# Altium PCB PCB.PcbDoc
Units mm, origin at the board's own origin, x right, y up, seen from the top; angles counter-clockwise.
Board outline 95 x 95 mm, 2 copper layers (Top Layer, Bottom Layer); 37 components, 174 nets, 449 pads, 190 vias.
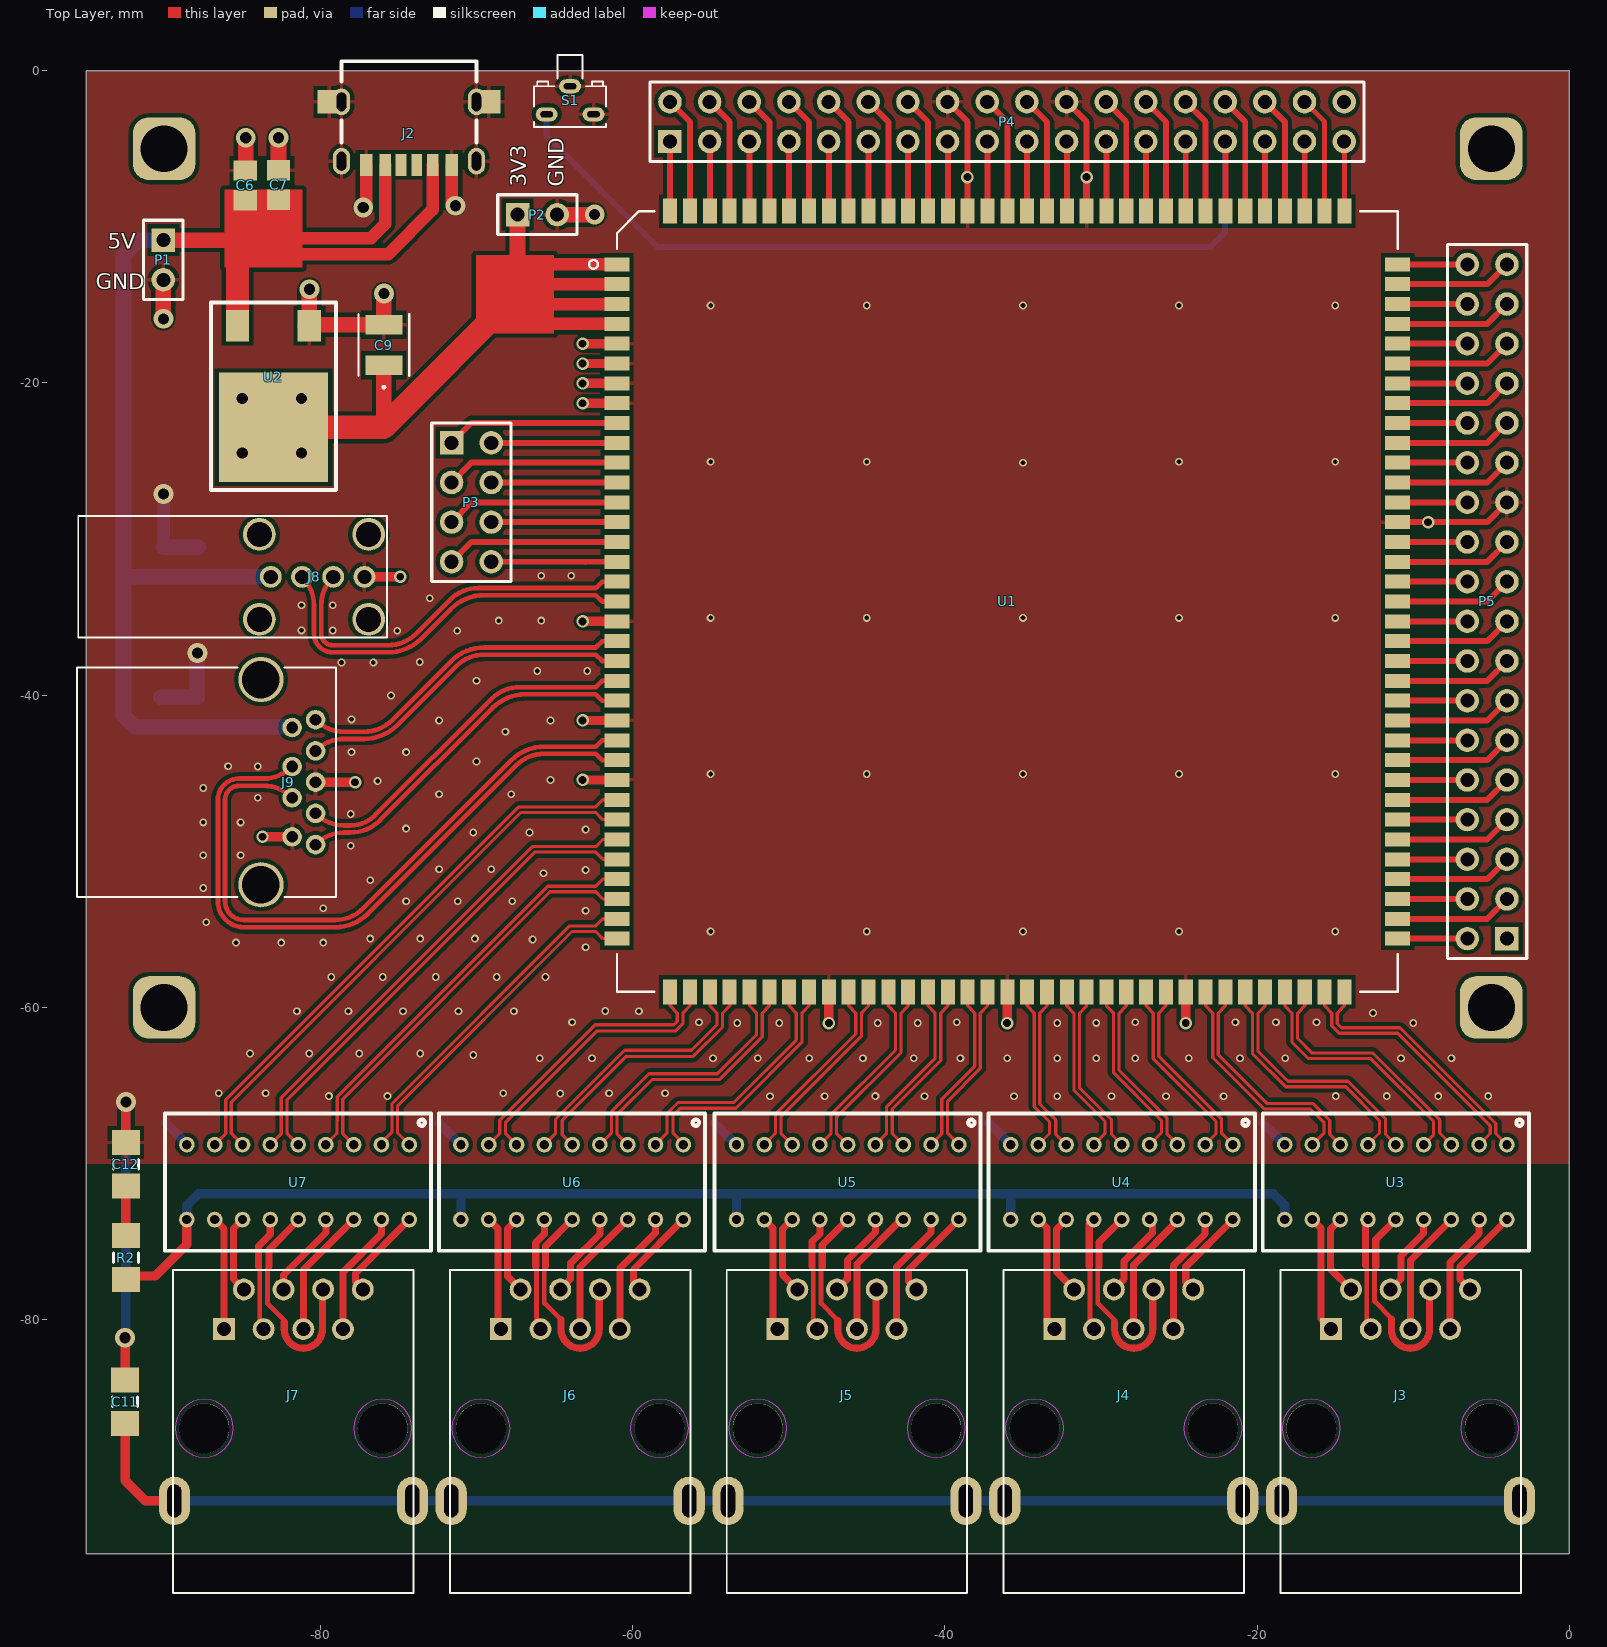
[diagram p0: Top Layer view]
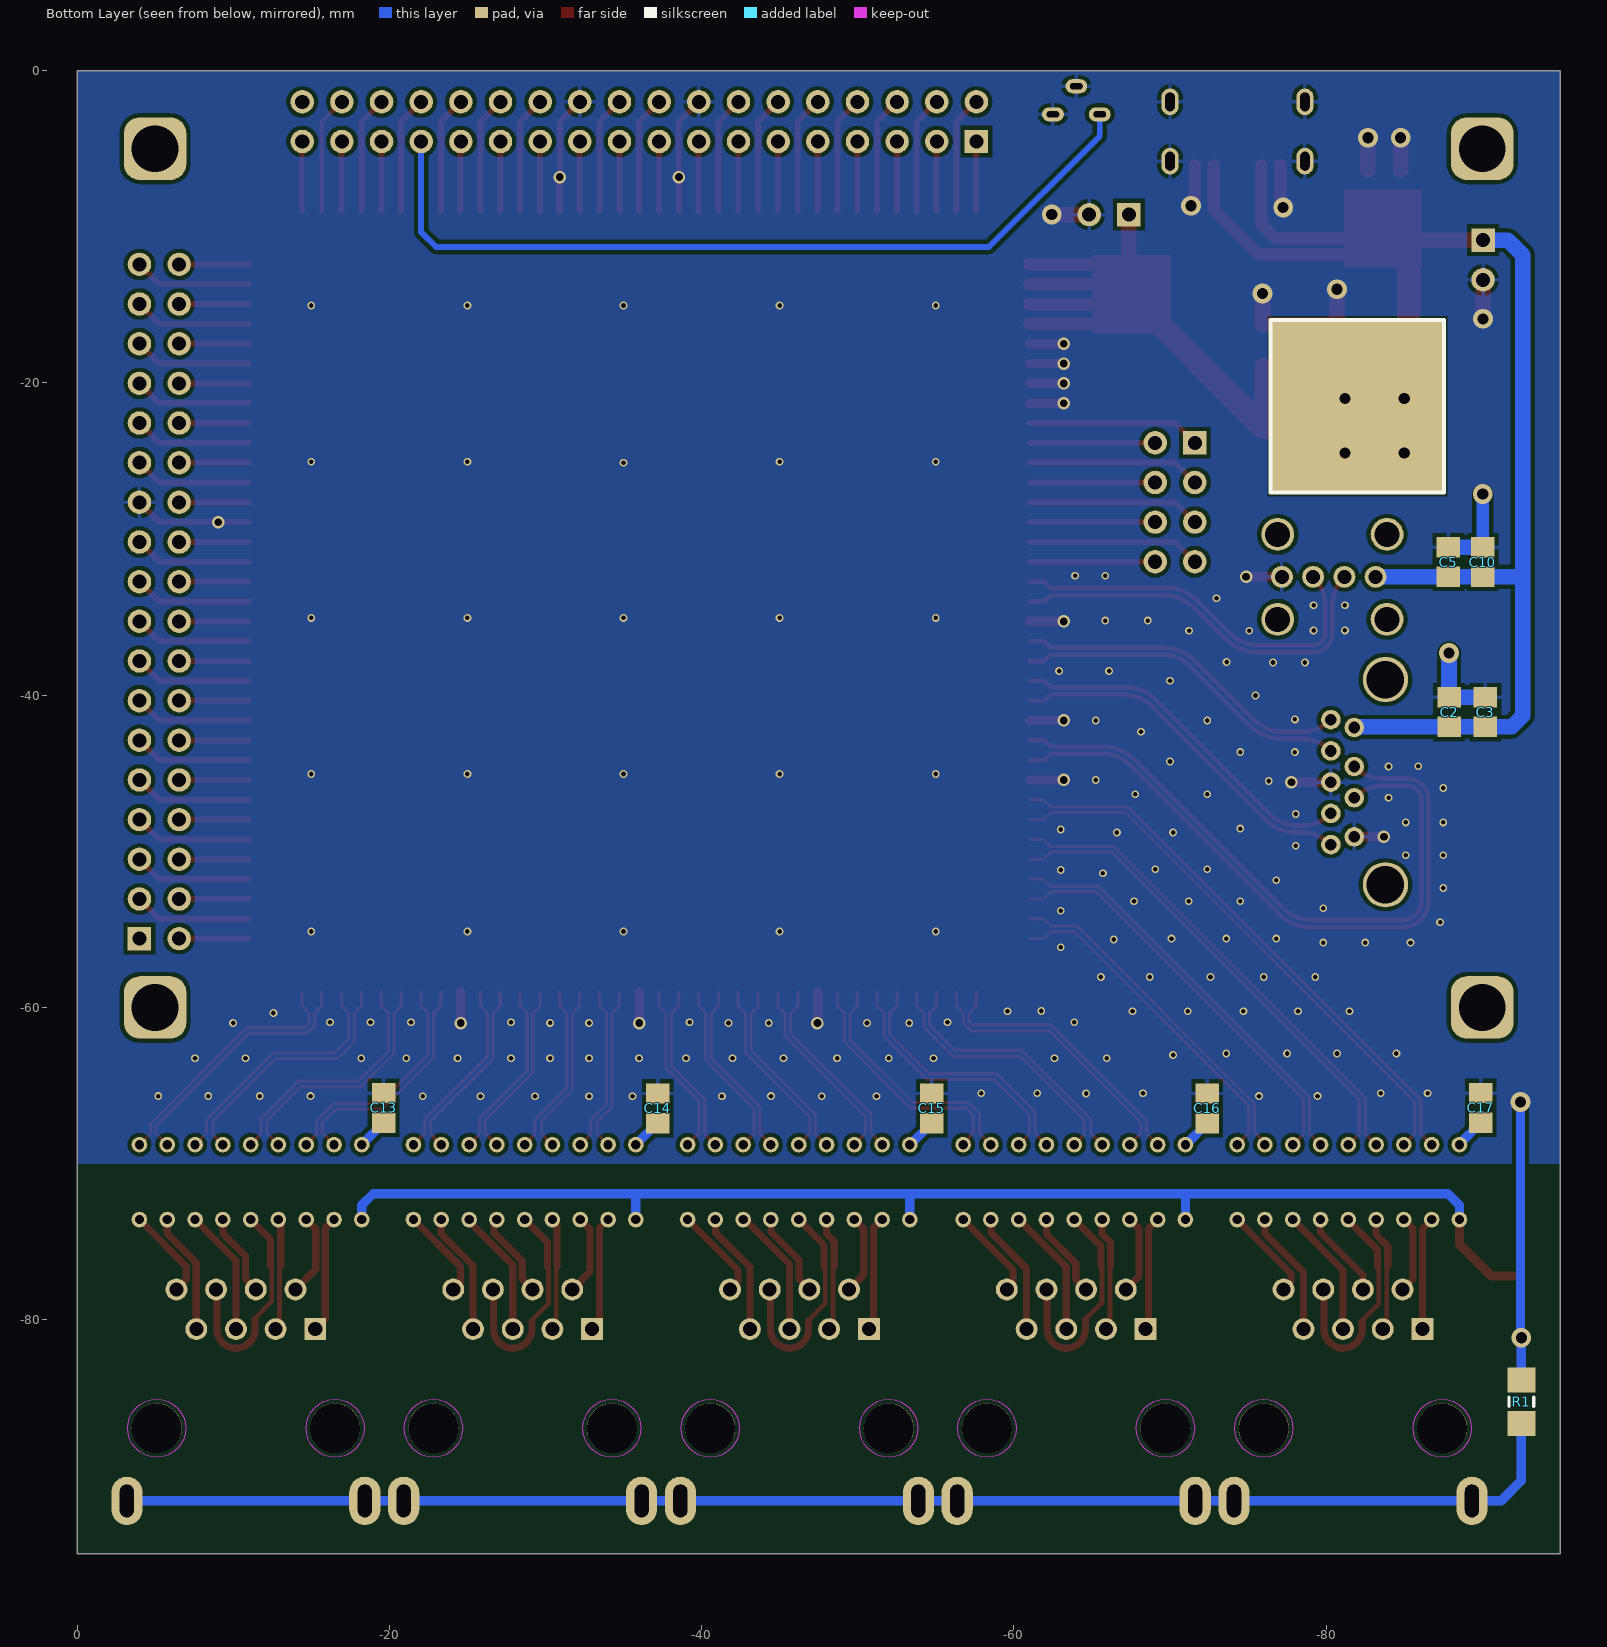
[diagram p1: Bottom Layer view, seen from below]

## Layer stack, top to bottom
Top Solder: solder mask 0.0102, Solder Resist, Dk 3.5
Top Layer: signal copper 0.0356
Dielectric 1: dielectric 0.32, FR-4, Dk 4.8
Bottom Layer: signal copper 0.0356
Bottom Solder: solder mask 0.0102, Solder Resist, Dk 3.5

## Board outline
-95,0 -95,-95 0,-95 0,0

## Design rules (kind name [scope] priority, off if disabled: settings)
Clearance Clearance_2 [InNamedPolygon('Top Layer-GND')] p1: gap=0.254 ignorepadtopadclearanceinfootprint=FALSE
Clearance Clearance_1 [InNamedPolygon('Bottom Layer-GND')] p2: gap=0.254 ignorepadtopadclearanceinfootprint=FALSE
Clearance [All] p3: gap=0.152 ignorepadtopadclearanceinfootprint=FALSE
DiffPairsRouting [All] p1: maxlimit=0.254 minlimit=0.102 mostfreqgap=0.152 toplayer_minwidth=0.203 toplayer_maxwidth=0.381 toplayer_prefwidth=0.305 bottomlayer_minwidth=0.203 bottomlayer_maxwidth=0.381 bottomlayer_prefwidth=0.305 maxuncoupledlength=12.7
HoleSize [All] p1: absolutevalues=TRUE maxlimit=5.08 minlimit=0.025 maxpercent=80.000 minpercent=20.000
MinimumSolderMaskSliver [All] p1: minsoldermaskwidth=0.102
PolygonConnect [All] p1: thpad.connectstyle=Relief thpad.reliefconductorwidth=0.254 thpad.reliefentries=4 thpad.polygonreliefangle="90 Angle" thpad.airgapwidth=0.254 smdpad.connectstyle=Relief smdpad.reliefconductorwidth=0.254 smdpad.reliefentries=4 smdpad.polygonreliefangle="90 Angle" smdpad.airgapwidth=0.254 via.connectstyle=Direct via.reliefconductorwidth=0.254 via.reliefentries=4 via.polygonreliefangle="90 Angle" via.airgapwidth=0.254
RoutingVias [All] p1: holewidth=0.711 width=1.27 viastyle="Through Hole" minholewidth=0.2 minwidth=0.4 maxholewidth=0.711 maxwidth=1.27
SilkToSolderMaskClearance [IsPad] p1: minsilkscreentomaskgap=0.102 clearancetoexposedcopper=TRUE
SolderMaskExpansion [All] p1: expansion=0.102
Width [All] p1: maxlimit=2 minlimit=0.254 preferedwidth=0.381
26 further rules are at their usual default settings.

## Classes and differential pairs
differential pair ESW_P4_D: +ESW_P4_D_P -ESW_P4_D_N
differential pair ESW_P4_C: +ESW_P4_C_P -ESW_P4_C_N
differential pair ESW_P4_B: +ESW_P4_B_P -ESW_P4_B_N
differential pair ESW_P4_A: +ESW_P4_A_P -ESW_P4_A_N
differential pair ESW_P3_D: +ESW_P3_D_P -ESW_P3_D_N
differential pair ESW_P3_C: +ESW_P3_C_P -ESW_P3_C_N
differential pair ESW_P3_B: +ESW_P3_B_P -ESW_P3_B_N
differential pair ESW_P3_A: +ESW_P3_A_P -ESW_P3_A_N
differential pair ESW_P2_D: +ESW_P2_D_P -ESW_P2_D_N
differential pair ESW_P2_C: +ESW_P2_C_P -ESW_P2_C_N
differential pair ESW_P2_B: +ESW_P2_B_P -ESW_P2_B_N
differential pair ESW_P2_A: +ESW_P2_A_P -ESW_P2_A_N
differential pair ESW_P1_D: +ESW_P1_D_P -ESW_P1_D_N
differential pair ESW_P1_C: +ESW_P1_C_P -ESW_P1_C_N
differential pair ESW_P1_B: +ESW_P1_B_P -ESW_P1_B_N
differential pair ESW_P1_A: +ESW_P1_A_P -ESW_P1_A_N
differential pair ESW_P0_D: +ESW_P0_D_P -ESW_P0_D_N
differential pair ESW_P0_C: +ESW_P0_C_P -ESW_P0_C_N
differential pair ESW_P0_B: +ESW_P0_B_P -ESW_P0_B_N
differential pair ESW_P0_A: +ESW_P0_A_P -ESW_P0_A_N
differential pair USB3: +USB3_P -USB3_N
differential pair USB3_SS_TX: +USB3_SS_TX_P -USB3_SS_TX_N
differential pair USB3_SS_RX: +USB3_SS_RX_P -USB3_SS_RX_N
differential pair USB2: +USB2_P -USB2_N
differential pair PCIE_TX2: +PCIE_TX2_P -PCIE_TX2_N
differential pair PCIE_TX1: +PCIE_TX1_P -PCIE_TX1_N
differential pair PCIE_TX0: +PCIE_TX0_P -PCIE_TX0_N
differential pair PCIE_RX2: +PCIE_RX2_P -PCIE_RX2_N
differential pair PCIE_RX1: +PCIE_RX1_P -PCIE_RX1_N
differential pair PCIE_RX0: +PCIE_RX0_P -PCIE_RX0_N
differential pair PCIE_CK2: +PCIE_CK2_P -PCIE_CK2_N
differential pair PCIE_CK1: +PCIE_CK1_P -PCIE_CK1_N
differential pair PCIE_CK0: +PCIE_CK0_P -PCIE_CK0_N

## Components (designator, comment, footprint, x,y, rotation, side; value= is the part's Value field where it differs from the comment)
C2 "Cap" 6-0805 -87.872,-41.081 r90 bottom value=0.1uF
C3 "Cap" 6-0805 -90.202,-41.081 r90 bottom value=106/10V
C5 "Cap" 6-0805 -87.83,-31.471 r90 bottom value=0.1uF
C6 "Cap" 6-0805 -84.8,-7.348 r270 top value=4.7uF
C7 "Cap" 6-0805 -82.675,-7.323 r270 top value=0.1uF
C9 "Cap Pol2" 3528B -75.925,-17.573 r90 top value=22uF
C10 "Cap" 6-0805 -90.03,-31.471 r90 bottom value=106/10V
C11 "Cap" 8-1206 -92.5,-85.248 r270 top value=1nF
C12 "Cap" 8-1206 -92.45,-70.048 r90 top value=1000pF/2KV
C13 "Cap" 6-0805 -19.64,-66.43 r90 bottom value=1nF/100V
C14 "Cap" 6-0805 -37.19,-66.459 r90 bottom value=1nF/100V
C15 "Cap" 6-0805 -54.742,-66.459 r90 bottom value=1nF/100V
C16 "Cap" 6-0805 -72.39,-66.459 r90 bottom value=1nF/100V
C17 "Cap" 6-0805 -89.9,-66.43 r90 bottom value=1nF/100V
J2 "USB Type-C 6P" "USB TYPE-C 6P" -74.32,-2 r180 top
J3 "RJ45*1" RJ45*1 -5.1,-86.95 r180 top
J4 "RJ45*1" RJ45*1 -22.826,-86.95 r180 top
J5 "RJ45*1" RJ45*1 -40.552,-86.95 r180 top
J6 "RJ45*1" RJ45*1 -58.279,-86.95 r180 top
J7 "RJ45*1" RJ45*1 -76.005,-86.95 r180 top
J8 "USB2.0" USB2.0 -83.17,-32.42 r270 top locked
J9 "USB3.0" USB3.0_0 -81.8,-42.07 r270 top locked
P1 "Header 2" HDR1X2 -90.05,-10.856 r270 top
P2 "Header 2" HDR1X2 -67.365,-9.223 r0 top
P3 "Header 4X2" HDR2X4 -71.59,-23.835 r270 top
P4 "Header 18X2" HDR2X18 -57.605,-4.54 r0 top
P5 "Header 18X2" HDR2X18 -4,-55.59 r90 top
R1 "Res2" 8-1206 -92.5,-85.248 r270 bottom value=1M
R2 "Res2" 8-1206 -92.45,-76.018 r270 top value=75
S1 "SW_PB" SW_PB -64,-1 r90 top
U1 "MT7621A" HLK-7621 -61,-12.41 r0 top locked
U2 "AMS1084CD-3.3" TO252 -83,-22.846 r180 top
U3 "transformer*1" TRANSFORMER_G1801D -4,-68.782 r180 top
U4 "transformer*1" TRANSFORMER_G1801D -21.55,-68.782 r180 top
U5 "transformer*1" TRANSFORMER_G1801D -39.102,-68.782 r180 top
U6 "transformer*1" TRANSFORMER_G1801D -56.75,-68.782 r180 top
U7 "transformer*1" TRANSFORMER_G1801D -74.3,-68.782 r180 top

## Footprints (in the part's own frame and the unit in brackets; to place one, negate y for a bottom-side part, rotate by r counter-clockwise, add the part's x,y. Pads: shape width x height; smd on the part's side, far side on the other; paste and mask are expansions set on the pad)
6-0805 [mm] "Chip Resistor; Body 2 x 1.2 mm (LxW typ)"
  rect 1.3x1.5 smd: 1(-0.95,0) 2(0.95,0)
8-1206 [mm] "Chip Resistor; Body 3.1 x 1.6 mm (LxW typ)"
  rect 1.6x1.8 smd: 1(-1.4,0) 2(1.4,0)
  silkscreen extent -0.3,-0.8 0.3,0.8
3528B [mm]
  rect 1.262x2.363 smd paste+0 mask+0: 1(-1.293,0) 2(1.293,0)
  silkscreen extent -2.78,-1.63 1.98,1.63, body extent 0,0 0.25,0.25, height 0.25
HDR1X2 [mm] "Connector; Header; 2 Position"
  rect 1.5x1.5 hole 0.9: 1(0,0)
  round 1.5 hole 0.9: 2(2.54,0)
  silkscreen extent -1.27,-1.27 3.81,1.27
HDR2X4 [mm] "Connector; Header; 4x2 Position"
  rect 1.5x1.5 hole 0.9: 1(0,0)
  round 1.5 hole 0.9: 2(0,2.54) 3(2.54,0) 4(2.54,2.54) 5(5.08,0) 6(5.08,2.54) 7(7.62,0) 8(7.62,2.54)
  silkscreen extent -1.27,-1.27 8.89,3.81
HDR2X18 [mm] "Connector; Header; 18x2 Position"
  rect 1.5x1.5 hole 0.9: 1(0,0)
  round 1.5 hole 0.9: 2(0,2.54) 3(2.54,0) 4(2.54,2.54) 5(5.08,0) 6(5.08,2.54) 7(7.62,0) 8(7.62,2.54) 9(10.16,0) 10(10.16,2.54) 11(12.7,0) 12(12.7,2.54) 13(15.24,0) 14(15.24,2.54) 15(17.78,0) 16(17.78,2.54) 17(20.32,0) 18(20.32,2.54) 19(22.86,0) 20(22.86,2.54) 21(25.4,0) 22(25.4,2.54) 23(27.94,0) 24(27.94,2.54) 25(30.48,0) 26(30.48,2.54) 27(33.02,0) 28(33.02,2.54) 29(35.56,0) 30(35.56,2.54) 31(38.1,0) 32(38.1,2.54) 33(40.64,0) 34(40.64,2.54) 35(43.18,0) 36(43.18,2.54)
  silkscreen extent -1.27,-1.27 44.45,3.81
HLK-7621 [mm]
  rect 1.6x0.9 smd: 1(0,0) 2(0,-1.27) 3(0,-2.54) 4(0,-3.81) 5(0,-5.08) 6(0,-6.35) 7(0,-7.62) 8(0,-8.89) 9(0,-10.16) 10(0,-11.43) 11(0,-12.7) 12(0,-13.97) 13(0,-15.24) 14(0,-16.51) 15(0,-17.78) 16(0,-19.05) 17(0,-20.32) 18(0,-21.59) 19(0,-22.86) 20(0,-24.13) 21(0,-25.4) 22(0,-26.67) 23(0,-27.94) 24(0,-29.21) 25(0,-30.48) 26(0,-31.75) 27(0,-33.02) 28(0,-34.29) 29(0,-35.56) 30(0,-36.83) 31(0,-38.1) 32(0,-39.37) 33(0,-40.64) 34(0,-41.91) 35(0,-43.18) 71(50,-43.18) 72(50,-41.91) 73(50,-40.64) 74(50,-39.37) 75(50,-38.1) 76(50,-36.83) 77(50,-35.56) 78(50,-34.29) 79(50,-33.02) 80(50,-31.75) 81(50,-30.48) 82(50,-29.21) 83(50,-27.94) 84(50,-26.67) 85(50,-25.4) 86(50,-24.13) 87(50,-22.86) 88(50,-21.59) 89(50,-20.32) 90(50,-19.05) 91(50,-17.78) 92(50,-16.51) 93(50,-15.24) 94(50,-13.97) 95(50,-12.7) 96(50,-11.43) 97(50,-10.16) 98(50,-8.89) 99(50,-7.62) 100(50,-6.35) 101(50,-5.08) 102(50,-3.81) 103(50,-2.54) 104(50,-1.27) 105(50,0)
  rect 0.9x1.6 smd: 36(3.41,-46.59) 37(4.68,-46.59) 38(5.95,-46.59) 39(7.22,-46.59) 40(8.49,-46.59) 41(9.76,-46.59) 42(11.03,-46.59) 43(12.3,-46.59) 44(13.57,-46.59) 45(14.84,-46.59) 46(16.11,-46.59) 47(17.38,-46.59) 48(18.65,-46.59) 49(19.92,-46.59) 50(21.19,-46.59) 51(22.46,-46.59) 52(23.73,-46.59) 53(25,-46.59) 54(26.27,-46.59) 55(27.54,-46.59) 56(28.81,-46.59) 56(28.81,-46.59) 57(30.08,-46.59) 58(31.35,-46.59) 59(32.62,-46.59) 60(33.89,-46.59) 61(35.16,-46.59) 62(36.43,-46.59) 63(37.7,-46.59) 64(38.97,-46.59) 65(40.24,-46.59) 66(41.51,-46.59) 67(42.78,-46.59) 68(44.05,-46.59) 69(45.32,-46.59) 70(46.59,-46.59) 106(46.59,3.41) 107(45.32,3.41) 108(44.05,3.41) 109(42.78,3.41) 110(41.51,3.41) 111(40.24,3.41) 112(38.97,3.41) 113(37.7,3.41) 114(36.43,3.41) 115(35.16,3.41) 116(33.89,3.41) 117(32.62,3.41) 118(31.35,3.41) 119(30.08,3.41) 120(28.81,3.41) 121(27.54,3.41) 122(26.27,3.41) 123(25,3.41) 124(23.73,3.41) 125(22.46,3.41) 126(21.19,3.41) 127(19.92,3.41) 128(18.65,3.41) 129(17.38,3.41) 130(16.11,3.41) 131(14.84,3.41) 132(13.57,3.41) 133(12.3,3.41) 134(11.03,3.41) 135(9.76,3.41) 136(8.49,3.41) 137(7.22,3.41) 138(5.95,3.41) 139(4.68,3.41) 140(3.41,3.41)
  silkscreen extent -1.78,-46.59 50,3.41
RJ45*1 [mm]
  rect 1.4x1.4 / inner round 1.4 / far side rect 1.4x1.4 hole 0.9: 1(10.16,-6.35)
  round 1.4 hole 0.9: 2(8.89,-8.89) 3(7.62,-6.35) 4(6.35,-8.89) 5(5.08,-6.35) 6(3.81,-8.89) 7(2.54,-6.35) 8(1.27,-8.89)
  oval 2x3.1 hole 0.9 slot 2.1 at 90 deg: 9(13.335,4.65) 10(-1.905,4.65)
  round 3.2 hole 3.2 unplated: ""(0,0) ""(11.43,0)
  Keep-Out Layer pour cut-out: 9.567,0 9.603,-0.363 9.709,-0.713 9.881,-1.035 10.113,-1.317 10.395,-1.549 10.717,-1.721 11.067,-1.827 11.43,-1.863 11.793,-1.827 12.143,-1.721 12.465,-1.549 12.747,-1.317 12.979,-1.035 13.151,-0.713 13.257,-0.363 13.293,0 13.257,0.363 13.151,0.713 12.979,1.035 12.747,1.317 12.465,1.549 12.143,1.721 11.793,1.827 11.43,1.863 11.067,1.827 10.717,1.721 10.395,1.549 10.113,1.317 9.881,1.035 9.709,0.713 9.603,0.363
  Keep-Out Layer pour cut-out: -1.863,0 -1.827,-0.363 -1.721,-0.713 -1.549,-1.035 -1.317,-1.317 -1.035,-1.549 -0.713,-1.721 -0.363,-1.827 0,-1.863 0.363,-1.827 0.713,-1.721 1.035,-1.549 1.317,-1.317 1.549,-1.035 1.721,-0.713 1.827,-0.363 1.863,0 1.827,0.363 1.721,0.713 1.549,1.035 1.317,1.317 1.035,1.549 0.713,1.721 0.363,1.827 0,1.863 -0.363,1.827 -0.713,1.721 -1.035,1.549 -1.317,1.317 -1.549,1.035 -1.721,0.713 -1.827,0.363
  silkscreen extent -1.99,-10.15 13.41,10.55
SW_PB [mm]
  oval 0.9x1.4 hole 0.4 slot 0.8 at 90 deg: 1(-1.8,1.5) 2(-1.8,-1.5) 3(0,0)
  silkscreen extent -2.6,-2.3 2,2.3
TO252 [mm]
  rect 1.5x2 smd paste+0 mask+0: 1(-2.3,-6.5) 3(2.3,-6.5)
  rect 7x7 smd paste+0 mask+0: 2(0,0)
  silkscreen extent -4,-8 4,4
TRANSFORMER_G1801D [mm]
  round 1 hole 0.6: 1(0,0) 2(1.78,0) 3(3.56,0) 4(5.34,0) 5(7.12,0) 6(8.9,0) 7(10.68,0) 8(12.46,0) 9(14.24,0) 10(14.24,4.8) 11(12.46,4.8) 12(10.68,4.8) 13(8.9,4.8) 14(7.12,4.8) 15(5.34,4.8) 16(3.56,4.8) 17(1.78,4.8) 18(0,4.8)
  silkscreen extent -1.4,-2 15.64,6.8
USB2.0 [mm]
  round 1.4 hole 0.9: 1(0,0) 2(0,2) 3(0,4) 4(0,6)
  round 2.1 hole 1.6: 5(2.72,-0.73) 6(-2.72,-0.73) 7(2.72,6.27) 8(-2.72,6.27)
  silkscreen extent -3.9,-12.33 3.9,7.44
USB3.0_0 [mm]
  round 1.25 hole 0.75: 1(0,0) 2(2.5,0) 3(4.5,0) 4(7,0) 5(7.5,1.5) 6(5.5,1.5) 7(3.5,1.5) 8(1.5,1.5) 9(-0.5,1.5)
  round 2.9 hole 2.4: ""(-3.07,-2) ""(10.07,-2)
  silkscreen extent -3.85,-13.78 10.85,2.82
"USB TYPE-C 6P" [mm]
  rect 0.7x1.4 smd paste+0 mask+0: A5(-0.5,4.05) B5(0.5,4.05)
  rect 0.76x1.4 smd paste+0 mask+0: A9(1.52,4.05) B9(-1.52,4.05)
  rect 0.8x1.4 smd paste+0 mask+0: A12(2.75,4.05) B12(-2.75,4.05)
  rect 1.5x1.5 smd paste+0 mask+0.102: ""(-5.1,0)
  oval 1.1x1.7 hole 1.2 slot 0.6 at 0 deg: ""(-4.32,3.8) ""(-4.32,0) ""(4.32,3.8) ""(4.32,0)
  rect 1.5x1.5 smd paste+0 mask+0: ""(5.1,0)
  silkscreen extent -4.32,-2.6 4.32,2.6

## Part data
C2 C3 C5 C6 C7 C10 C11 C12 C13 C14 C15 C16 C17: "Capacitor", LatestRevisionDate=17-Jul-2002, LatestRevisionNote="Re-released for DXP Platform.", PackageDescription="Radial Cap, Thru-Hole; 2 Leads; 0.3 in Pin Spacing", PackageReference=RAD-0.3, Published=8-Jun-2000, Publisher="Altium Limited"
C9: "Polarized Capacitor (Axial)", LatestRevisionDate=17-Jul-2002, LatestRevisionNote="Re-released for DXP Platform.", PackageDescription="Polarized Capacitor; 2 Leads", PackageReference=POLAR0.8, Published=8-Jun-2000, Publisher="Altium Limited"
P1 P2: "Header, 2-Pin", LatestRevisionDate=17-Jul-2002, LatestRevisionNote="Re-released for DXP Platform.", Publisher="Altium Limited"
P3: "Header, 4-Pin, Dual row", LatestRevisionDate=17-Jul-2002, LatestRevisionNote="Re-released for DXP Platform.", Publisher="Altium Limited"
P4 P5: "Header, 18-Pin, Dual row", LatestRevisionDate=17-Jul-2002, LatestRevisionNote="Re-released for DXP Platform.", Publisher="Altium Limited"
R1 R2: "Resistor", LatestRevisionDate=17-Jul-2002, LatestRevisionNote="Re-released for DXP Platform.", PackageDescription="Axial Device, Thru-Hole; 2 Leads; 0.4 in Pin Spacing", PackageReference=AXIAL-0.4, Published=8-Jun-2000, Publisher="Altium Limited"

## Free pads (board coordinates)
  rrect50% 4x4 hole 3: 1(-90,-5) 2(-5,-5) 3(-90,-60) 4(-5,-60)
  rect 11x11 smd far side: 2(-82,-21.5)

## Via types
v1: diameter 0.5, hole 0.3, Top Layer to Bottom Layer, tented both sides, 158 vias
v2: diameter 0.8, hole 0.5, Top Layer to Bottom Layer, tented both sides, 16 vias
v3: diameter 1.27, hole 0.711, Top Layer to Bottom Layer, tented both sides, 16 vias

## Nets (pads, with @x,y where several pads share a name; then routed paths per layer and width w, separated by ;. In a path a pad name is that pad's centre, name@x,y a point inside that pad or via, vN(x,y) a via of type N, cw(c..) or ccw(c..) an arc to the next point about the centre after c; other vN are vias at no path point)
3V3: C9.1 P2.1 pad.2@-82,-21.5 U1.1 U1.2 U1.3 U1.4 U2.2 | length 45.7
  Top Layer w0.8: -65.8,-12.41 U1.1 ; -65.55,-13.68 U1.2 ; -65.5,-14.95 U1.3 ; -65.4,-16.22 U1.4
  Top Layer w1: -75.925,-22.823 C9.1 ; -67.365,-13.533 P2.1
  Top Layer w1.5: U2.2 -75.948,-22.846 -75.925,-22.823 -67.4,-14.298
  other v3: -85,-24.5 -81.2,-24.5 -85,-21 -81.2,-21
5VD: C2.1 C3.1 C5.1 C6.2 C7.2 C10.1 J2.A9 J2.B9 J8.1 J9.1 P1.1 U2.3 | length 89.9
  Top Layer w0.8: -83.6,-10.448 -83.325,-10.723 -76.74,-10.723 -75.84,-9.823 J2.A9 ; -83.575,-11.748 -75.645,-11.748 -72.8,-8.903 J2.B9
  Top Layer w1: P1.1 -84.5,-10.856
  Top Layer w1.5: U2.3 -85.3,-11.798
  Bottom Layer w1: P1.1 -91.635,-10.856 -92.6,-11.821 -92.6,-32.4 ; C2.1 -81.839,-42.031 J9.1 ; C2.1 C3.1 -91.869,-42.031 -92.6,-41.3 -92.6,-32.4 ; J8.1@-83.171,-32.421 C5.1 C10.1 -92.579,-32.421 -92.6,-32.4
A_POR_BPS: P5.12 U1.81 | length 4.5
  Top Layer w0.381: U1.81 P5.12
CH340_RX: P5.25 U1.94 | length 7.5
  Top Layer w0.381: U1.94 -5.27,-26.38 P5.25
CH340_TX: P5.24 U1.93 | length 4.5
  Top Layer w0.381: U1.93 P5.24
CTS2_N: P3.7 U1.15 | length 11.1
  Top Layer w0.381: P3.7 -70.325,-30.19 U1.15
CTS3_N: P3.1 U1.9 | length 11.1
  Top Layer w0.381: P3.1 -70.325,-22.57 U1.9
ESW_P0_A_N: U1.29 U7.7 | length 35.6
  Top Layer w0.203: U7.7 -85.7,-68.062 -85.7,-66.062 -67.151,-47.513 -62.359,-47.513 -61.902,-47.97 U1.29
ESW_P0_A_P: U1.28 U7.8 | length 36.2
  Top Layer w0.203: U7.8 -86.056,-68.077 -86.056,-65.914 -67.298,-47.157 -62.359,-47.157 -61.902,-46.7 U1.28
ESW_P0_B_N: U1.31 U7.5 | length 31
  Top Layer w0.203: U7.5 -82.126,-68.076 -82.126,-65.911 -66.268,-50.053 -62.359,-50.053 -61.902,-50.51 U1.31
ESW_P0_B_P: U1.30 U7.6 | length 31.6
  Top Layer w0.203: U7.6 -82.5,-68.082 -82.5,-65.782 -66.415,-49.697 -62.359,-49.697 -61.902,-49.24 U1.30
ESW_P0_C_N: U1.33 U7.3 | length 26.5
  Top Layer w0.203: U7.3 -78.56,-68.082 -78.56,-65.867 -65.286,-52.593 -62.359,-52.593 -61.902,-53.05 U1.33
ESW_P0_C_P: U1.32 U7.4 | length 27.1
  Top Layer w0.203: U7.4 -78.933,-68.075 -78.933,-67.24 -78.915,-67.223 -78.915,-65.72 -65.433,-52.237 -62.359,-52.237 -61.902,-51.78 U1.32
ESW_P0_D_N: U1.35 U7.1 | length 21.6
  Top Layer w0.203: U7.1 -75.044,-68.037 -75.044,-66.301 -63.876,-55.133 -62.359,-55.133 -61.902,-55.59 U1.35
ESW_P0_D_P: U1.34 U7.2 | length 22.2
  Top Layer w0.203: U7.2 -76.08,-68.639 -75.4,-67.959 -75.4,-66.154 -64.023,-54.777 -62.359,-54.777 -61.902,-54.32 U1.34
ESW_P0_LED_0: P5.6 U1.75 | length 4.5
  Top Layer w0.381: U1.75 P5.6
ESW_P0_LED_1: P5.7 U1.76 | length 7.5
  Top Layer w0.381: U1.76 -5.27,-49.24 P5.7
ESW_P1_A_N: U1.37 U6.7 | length 17.9
  Top Layer w0.203: U6.7 -68.144,-68.067 -68.144,-67.371 -62.273,-61.5 -57.236,-61.5 -56.777,-61.041 -56.777,-60.359 -56.32,-59.902 U1.37
ESW_P1_A_P: U1.36 U6.8 | length 17.9
  Top Layer w0.203: U6.8 -68.5,-68.072 -68.5,-67.224 -62.386,-61.11 -57.348,-61.11 -57.133,-60.894 -57.133,-60.359 -57.59,-59.902 U1.36
ESW_P1_B_N: U1.39 U6.5 | length 17
  Top Layer w0.203: U6.5 -64.5,-68.152 -64.5,-67.235 -60.401,-63.136 -56.116,-63.136 -54.237,-61.257 -54.237,-60.359 -53.78,-59.902 U1.39
ESW_P1_B_P: U1.38 U6.6 | length 17.1
  Top Layer w0.203: U6.6 -64.945,-68.077 -64.945,-67.177 -60.548,-62.78 -60.525,-62.78 -60.484,-62.738 -56.221,-62.738 -54.593,-61.11 -54.593,-60.359 -55.05,-59.902 U1.38
ESW_P1_C_N: U1.41 U6.3 | length 16.6
  Top Layer w0.203: U6.3 -61,-68.092 -61,-66.882 -58.724,-64.606 -54.421,-64.606 -51.697,-61.882 -51.697,-60.359 -51.24,-59.902 U1.41
ESW_P1_C_P: U1.40 U6.4 | length 16.7
  Top Layer w0.203: U6.4 -61.356,-68.047 -61.356,-66.734 -61.3,-66.679 -61.3,-66.604 -58.946,-64.25 -54.568,-64.25 -52.053,-61.735 -52.053,-60.359 -52.51,-59.902 U1.40
ESW_P1_D_N: U1.43 U6.1 | length 15.8
  Top Layer w0.203: U6.1 -56.75,-68.702 -57.4,-68.052 -57.4,-66.904 -56.955,-66.459 -53.377,-66.459 -49.157,-62.239 -49.157,-60.359 -48.7,-59.902 U1.43
ESW_P1_D_P: U1.42 U6.2 | length 15.8
  Top Layer w0.203: U6.2 -57.8,-68.052 -57.8,-66.795 -57.09,-66.086 -53.507,-66.086 -49.513,-62.092 -49.513,-60.359 -49.97,-59.902 U1.42
ESW_P1_LED_0: P5.5 U1.74 | length 7.5
  Top Layer w0.381: U1.74 -5.27,-51.78 P5.5
ESW_P2_A_N: U1.46 U5.7 | length 12.4
  Top Layer w0.203: U5.7 -50.5,-68.064 -50.5,-66.996 -45.347,-61.843 -45.347,-60.359 -44.89,-59.902 U1.46
ESW_P2_A_P: U1.45 U5.8 | length 12.4
  Top Layer w0.203: U5.8 -50.856,-68.075 -50.856,-66.849 -45.703,-61.696 -45.703,-60.359 -46.16,-59.902 U1.45
ESW_P2_B_N: U1.48 U5.5 | length 12
  Top Layer w0.203: U5.5 -46.944,-68.06 -46.944,-67.029 -42.807,-62.892 -42.807,-60.359 -42.35,-59.902 U1.48
ESW_P2_B_P: U1.47 U5.6 | length 12
  Top Layer w0.203: U5.6 -47.3,-68.079 -47.3,-66.876 -43.163,-62.738 -43.163,-60.359 -43.62,-59.902 U1.47
ESW_P2_C_N: U1.50 U5.3 | length 11.6
  Top Layer w0.203: U5.3 -43.372,-68.072 -43.372,-66.5 -40.267,-63.395 -40.267,-60.359 -39.81,-59.902 U1.50
ESW_P2_C_P: U1.49 U5.4 | length 11.6
  Top Layer w0.203: U5.4 -43.728,-68.067 -43.728,-66.353 -40.623,-63.248 -40.623,-60.359 -41.08,-59.902 U1.49
ESW_P2_D_N: U1.52 U5.1 | length 11.1
  Top Layer w0.203: U5.1 -39.825,-68.059 -39.825,-66 -37.727,-63.902 -37.727,-60.359 -37.27,-59.902 U1.52
ESW_P2_D_P: U1.51 U5.2 | length 11.1
  Top Layer w0.203: U5.2 -40.2,-68.099 -40.2,-65.872 -38.083,-63.755 -38.083,-60.359 -38.54,-59.902 U1.51
ESW_P2_LED_0: P5.4 U1.73 | length 4.5
  Top Layer w0.381: U1.73 P5.4
ESW_P3_A_N: U1.55 U4.7 | length 10.7
  Top Layer w0.203: U1.55 -33.46,-59.902 -33.917,-60.359 -33.917,-66.186 -32.9,-67.203 -32.9,-68.112 U4.7
ESW_P3_A_P: U1.54 U4.8 | length 10.7
  Top Layer w0.203: U1.54 -34.73,-59.902 -34.273,-60.359 -34.273,-66.353 -33.3,-67.326 -33.3,-68.072 U4.8
ESW_P3_B_N: U1.57 U4.5 | length 11.1
  Top Layer w0.203: U1.57 -30.92,-59.902 -31.377,-60.359 -31.377,-65.141 -29.328,-67.19 -29.328,-68.124 U4.5
ESW_P3_B_P: U1.56 U4.6 | length 11.1
  Top Layer w0.203: U1.56@-32.19,-59 -32.19,-59.902 -31.733,-60.359 -31.733,-65.288 -29.75,-67.271 -29.75,-68.082 U4.6
ESW_P3_C_N: U1.59 U4.3 | length 11.5
  Top Layer w0.203: U1.59 -28.38,-59.902 -28.837,-60.359 -28.837,-64.035 -25.768,-67.104 -25.768,-68.124 U4.3
ESW_P3_C_P: U1.58 U4.4 | length 11.6
  Top Layer w0.203: U1.58 -29.65,-59.902 -29.193,-60.359 -29.193,-64.182 -26.124,-67.251 -26.124,-68.015 U4.4
ESW_P3_D_N: U1.61 U4.1 | length 12.1
  Top Layer w0.203: U1.61@-25.738,-59.102 U1.61 -25.84,-59.902 -26.297,-60.359 -26.297,-63.13 -22.277,-67.151 -22.277,-68.055 U4.1
ESW_P3_D_P: U1.60 U4.2 | length 12.1
  Top Layer w0.203: U1.60@-27.008,-59.102 U1.60 -27.11,-59.902 -26.653,-60.359 -26.653,-63.277 -22.632,-67.298 -22.632,-68.084 U4.2
ESW_P3_LED_0: P5.3 U1.72 | length 7.5
  Top Layer w0.381: U1.72 -5.27,-54.32 P5.3
ESW_P4_A_N: U1.64 U3.7 | length 14.9
  Top Layer w0.203: U1.64 -22.03,-59.902 -22.487,-60.359 -22.487,-63.04 -19.383,-66.144 -16.449,-66.144 -15.354,-67.239 -15.354,-68.108 U3.7
ESW_P4_A_P: U1.63 U3.8 | length 15
  Top Layer w0.203: U1.63 -23.3,-59.902 -22.843,-60.359 -22.843,-63.207 -19.55,-66.5 -16.596,-66.5 -15.709,-67.386 -15.709,-68.031 U3.8
ESW_P4_B_N: U1.66 U3.5 | length 15.9
  Top Layer w0.203: U1.66 -19.49,-59.902 -19.947,-60.359 -19.947,-62.8 -18.021,-64.726 -14.179,-64.726 -11.778,-67.128 -11.778,-68.124 U3.5
ESW_P4_B_P: U1.65 U3.6 | length 15.9
  Top Layer w0.203: U1.65 -20.76,-59.902 -20.303,-60.359 -20.303,-62.947 -18.168,-65.082 -14.327,-65.082 -12.161,-67.248 -12.161,-68.042 U3.6
ESW_P4_C_N: U1.68 U3.3 | length 16.3
  Top Layer w0.203: U1.68 -16.95,-59.902 -17.407,-60.359 -17.407,-61.989 -16.474,-62.922 -12.575,-62.922 -8.344,-67.153 -8.344,-67.156 -8.3,-67.2 -8.3,-68.042 U3.3
ESW_P4_C_P: U1.67 U3.4 | length 16.5
  Top Layer w0.203: U1.67@-18.118,-59.102 U1.67 -18.22,-59.902 -17.763,-60.359 -17.763,-62.227 -16.713,-63.277 -12.723,-63.277 -8.7,-67.3 -8.7,-68.142 U3.4
ESW_P4_D_N: U1.70 U3.1 | length 16.7
  Top Layer w0.203: U1.70 -14.41,-59.902 -14.867,-60.359 -14.867,-61.03 -14.597,-61.3 -10.846,-61.3 -4.712,-67.434 -4.712,-68.07 U3.1
ESW_P4_D_P: U1.69 U3.2 | length 16.7
  Top Layer w0.203: U1.69 -15.68,-59.902 -15.223,-60.359 -15.223,-61.177 -14.744,-61.656 -10.993,-61.656 -5.068,-67.581 -5.068,-68.07 U3.2
ESW_P4_LED_0: P5.2 U1.71 | length 4.5
  Top Layer w0.381: U1.71 P5.2
GE_MDC: P5.14 U1.83 | length 4.5
  Top Layer w0.381: U1.83 P5.14
GE_MDIO: P5.13 U1.82 | length 7.5
  Top Layer w0.381: U1.82 -5.27,-41.62 P5.13
GE_RXCLK: P5.22 U1.91 | length 4.5
  Top Layer w0.381: U1.91 P5.22
GE_RXD0: P5.20 U1.89 | length 4.5
  Top Layer w0.381: U1.89 P5.20
GE_RXD1: P5.19 U1.88 | length 7.5
  Top Layer w0.381: U1.88 -5.27,-34 P5.19
GE_RXD2: P5.18 U1.87 | length 4.5
  Top Layer w0.381: U1.87 P5.18
GE_RXD3: P5.17 U1.86 | length 7.5
  Top Layer w0.381: U1.86 -5.27,-36.54 P5.17
GE_RXDV: P5.21 U1.90 | length 7.5
  Top Layer w0.381: U1.90 -5.27,-31.46 P5.21
GE_TXCLK: P5.16 U1.85 | length 4.5
  Top Layer w0.381: U1.85 P5.16
GE_TXD0: P5.11 U1.80 | length 7.5
  Top Layer w0.381: U1.80 -5.27,-44.16 P5.11
GE_TXD1: P5.10 U1.79 | length 4.5
  Top Layer w0.381: U1.79 P5.10
GE_TXD2: P5.9 U1.78 | length 7.5
  Top Layer w0.381: U1.78 -5.27,-46.7 P5.9
GE_TXD3: P5.8 U1.77 | length 4.5
  Top Layer w0.381: U1.77 P5.8
GE_TXEN: P5.15 U1.84 | length 7.5
  Top Layer w0.381: U1.84 -5.27,-39.08 P5.15
GND: C2.2 C3.2 C5.2 C6.1 C7.1 C9.2 C10.2 C11.1 C12.2 C13.2 C14.2 C15.2 C16.2 C17.2 J2. J2.A12 J2.B12 J8.4 J9.4 J9.7 P1.2 P2.2 P4.16 P4.22 P5.23 R1.1 S1.2 S1.3 U1.5 U1.6 U1.7 U1.8 U1.19 U1.24 U1.27 U1.44 U1.53 U1.62 U1.92 U1.119 U1.125 U2.1 | length 108.3
  Top Layer w0.381: P4.16 -38.54,-3.285 v2@-38.54,-6.823 ; v2(-38.55,-6.823) -38.55,-8.99 U1.125 ; P4.22 -30.92,-3.285 v2@-30.92,-6.748 ; U1.92 v2(-9.05,-28.92) -5.27,-28.92 P5.23
  Top Layer w0.457: U1.27@-61.007,-45.423 U1.27 ; U1.19@-61.003,-35.273 U1.19 ; v2@-47.43,-60.99 v2(-47.42,-61) ; U1.119 v2(-30.92,-6.823) v2@-30.92,-6.748
  Top Layer w0.6: C11.1 v3(-92.5,-81.155) ; C12.2 v3(-92.45,-66.048) ; v2(-83.7,-49.07) J9.4@-81.827,-49.07 ; J9.7 v2(-77.775,-45.57) ; J8.4 v2(-74.875,-32.42) ; v2(-63.2,-45.423) -63.193,-45.43 U1.27 ; v2(-63.2,-41.62) U1.24 ; v2(-63.2,-35.273) -63.197,-35.27 U1.19 ; v2(-63.2,-21.3) U1.8 ; v2(-63.2,-20.03) U1.7 ; v2(-63.2,-18.76) U1.6 ; v2(-63.2,-17.49) U1.5 ; v2@-47.43,-60.99 U1.44 ; v2(-36.011,-61) -36,-60.989 U1.53 ; v2(-24.572,-61) -24.57,-60.998 U1.62
  Top Layer w0.8: v3(-77.25,-8.76) -77.07,-8.58 J2.A12 ; J2.B12 -71.57,-8.43 v3(-71.347,-8.653)
  Top Layer w1: v3(-90.05,-15.896) P1.2 ; C6.1@-84.775,-6.373 v3(-84.775,-4.298) ; C7.1 v3(-82.675,-4.298) ; U2.1 v3(-80.7,-14) ; U2.1@-80.634,-16.28 C9.2 ; C9.2 v3(-75.924,-14.273) ; P2.2 v3(-62.425,-9.223)
  Top Layer w1.5: U2.1 U2.1@-80.634,-16.28
  Bottom Layer w0.6: R1.1 v3(-92.5,-81.155) -92.45,-81.105 v3(-92.45,-66.048)
  Bottom Layer w0.8: C10.2 v3(-90.03,-27.121)
  Bottom Layer w1: C3.2 C2.2 v3(-87.872,-37.3) ; C10.2 C5.2
  other v1: -51.2,-65.689 -47.7,-65.689 -41.3,-65.689 -35.574,-65.689 -32.8,-65.689 -29.328,-65.689 -25.84,-65.689 -22.145,-65.689 -79.45,-65.68 -75.7,-65.68 -44.45,-65.68 -14.96,-65.68 -11.7,-65.68 -8.4,-65.68 -5.2,-65.68 -86.5,-65.5 -83.5,-65.5 -68.276,-65.5 -64.629,-65.509 -61.5,-65.5 -57.915,-65.5 -54.85,-63.25 -51.982,-63.25 -45.25,-63.25 -41.986,-63.25 -39.003,-63.25 -36,-63.25 -21.091,-63.25 -18.204,-63.25 -65.948,-63.248 -62.6,-63.248 -48.681,-63.248 -32.8,-63.248 -30.3,-63.248 -27.8,-63.248 -24.375,-63.248 -10.79,-63.248 -7.56,-63.248 -70.2,-63.048 -84.5,-62.948 -80.7,-62.948 -77.5,-62.948 -73.6,-62.948 -53.3,-60.99 -50.6,-61 -44.3,-60.99 -41.729,-60.99 -32.8,-61 -30.3,-60.989 -10,-61 -63.87,-60.948 -55.75,-60.953 -39.235,-60.948 -27.8,-60.953 -21.393,-60.948 -18.8,-60.948 -16.2,-60.953 -12.575,-60.359 -81.5,-60.248 -78.2,-60.248 -74.7,-60.248 -71.142,-60.248 -67.6,-60.248 -59.596,-60.248 -61.75,-60.223 -79.3,-58.048 -76,-58.048 -72.6,-58.048 -68.7,-58.048 -65.575,-58.048 -63.005,-56.148 -85.4,-55.848 -82.5,-55.848 -79.815,-55.848 -66.4,-55.648 -76.8,-55.59 -73.6,-55.59 -70.1,-55.59 -55,-55.133 -45,-55.133 -35,-55.133 -25,-55.133 -15,-55.133 -87.3,-54.548 -63.005,-53.8 -79.815,-53.648 -74.5,-53.2 -71.2,-53.2 -67.7,-53.2 -87.5,-52.348 -76.8,-51.848 -65.7,-51.4 -63.005,-51.2 -72.39,-51.148 -69.05,-51.148 -87.5,-50.248 -85.1,-50.248 -78.048,-49.648 -70.2,-48.799 -66.6,-48.8 -63.005,-48.6 -74.5,-48.548 -87.5,-48.148 -85.1,-48.148 -78.048,-47.614 -84,-46.57 -72.39,-46.348 -67.774,-46.348 -87.5,-45.948 -76.325,-45.498 -65.25,-45.43 -55,-45.048 -45,-45.048 -35,-45.048 -25,-45.048 -15,-45.048 -84,-44.57 -85.9,-44.548 -70,-44.248 -78,-43.648 -74.5,-43.648 -68.144,-42.341 -72.39,-41.62 -65.25,-41.62 -78,-41.548 -75.475,-40.023 -70,-39.08 -66.1,-38.448 -62.9,-38.448 -78.64,-37.91 -76.6,-37.91 -73.625,-37.873 -75.074,-35.873 -71.225,-35.873 -81.2,-35.848 -79.2,-35.859 -68.575,-35.223 -65.85,-35.223 -55,-35.048 -45,-35.048 -35,-35.048 -25,-35.048 -15,-35.048 -81.2,-34.244 -79.2,-34.244 -72.984,-33.798 -65.85,-32.348 -63.925,-32.348 -35,-25.11 -55,-25.048 -45,-25.048 -25,-25.048 -15,-25.048 -55,-15.048 -45,-15.048 -35,-15.048 -25,-15.048 -15,-15.048
GPIO0: P5.35 U1.104 | length 7.5
  Top Layer w0.381: U1.104 -5.27,-13.68 P5.35
I2C_CLK: P5.27 U1.96 | length 7.5
  Top Layer w0.381: U1.96 -5.27,-23.84 P5.27
I2C_SDA: P5.28 U1.97 | length 4.5
  Top Layer w0.381: U1.97 P5.28
JTAG_CLK: P4.17 U1.124 | length 4.5
  Top Layer w0.381: U1.124@-37.285,-8.985 U1.124 -37.27,-4.555 P4.17
JTAG_DI: P4.19 U1.122 | length 4.5
  Top Layer w0.381: P4.19 -34.73,-4.555 U1.122
JTAG_DO: P4.20 U1.121 | length 7.5
  Top Layer w0.381: P4.20 -33.46,-3.285 U1.121
JTAG_MS: P4.21 U1.120 | length 4.5
  Top Layer w0.381: P4.21 -32.19,-4.555 U1.120
JTAG_RST: P4.18 U1.123 | length 7.5
  Top Layer w0.381: P4.18 -36,-3.285 U1.123
ND_ALE: P4.3 U1.138 | length 4.5
  Top Layer w0.381: P4.3 -55.05,-4.555 U1.138
ND_CLE: P4.4 U1.137 | length 7.5
  Top Layer w0.381: P4.4 -53.78,-3.285 U1.137
ND_CS_N: P4.5 U1.136 | length 4.5
  Top Layer w0.381: P4.5 -52.51,-4.555 U1.136
ND_D0: P4.8 U1.133 | length 7.5
  Top Layer w0.381: P4.8 -48.7,-3.285 U1.133
ND_D1: P4.9 U1.132 | length 4.5
  Top Layer w0.381: P4.9 -47.43,-4.555 U1.132
ND_D2: P4.10 U1.131 | length 7.5
  Top Layer w0.381: P4.10 -46.16,-3.285 U1.131
ND_D3: P4.11 U1.130 | length 4.5
  Top Layer w0.381: P4.11 -44.89,-4.555 U1.130
ND_D4: P4.12 U1.129 | length 7.5
  Top Layer w0.381: P4.12 -43.62,-3.285 U1.129
ND_D5: P4.13 U1.128 | length 4.5
  Top Layer w0.381: P4.13 -42.35,-4.555 U1.128
ND_D6: P4.14 U1.127 | length 7.5
  Top Layer w0.381: P4.14 -41.08,-3.285 U1.127
ND_D7: P4.15 U1.126 | length 4.5
  Top Layer w0.381: U1.126@-39.825,-8.985 U1.126 -39.81,-4.555 P4.15
ND_RB_N: P4.7 U1.134 | length 4.5
  Top Layer w0.381: P4.7 -49.97,-4.555 U1.134
ND_RE_N: P4.6 U1.135 | length 7.5
  Top Layer w0.381: P4.6 -51.24,-3.285 U1.135
ND_WE_N: P4.2 U1.139 | length 7.5
  Top Layer w0.381: P4.2 -56.32,-3.285 U1.139
ND_WP: P4.1 U1.140 | length 4.5
  Top Layer w0.381: P4.1 -57.59,-4.555 U1.140
NetC11_2: C11.2 J3.9 J3.10 J4.9 J4.10 J5.9 J5.10 J6.9 J6.10 J7.9 J7.10 R1.2 | length 100.8
  Top Layer w0.6: C11.2 -92.5,-90.3 -91.2,-91.6 J7.9
  Bottom Layer w0.6: R1.2 -92.5,-90.3 -91.2,-91.6 J7.9 J7.10 J6.9 J6.10 J5.9 J5.10 J4.9 J4.10 J3.9 J3.10
NetC12_1: C12.1 R2.1 | length 3.2
  Top Layer w0.6: R2.1 C12.1
NetC13_1: C13.1 U3.9 | length 2
  Bottom Layer w0.6: C13.1 -19.64,-67.382 U3.9
NetC14_1: C14.1 U4.9 | length 2
  Bottom Layer w0.6: C14.1 -37.163,-67.409 U4.9
NetC15_1: C15.1 U5.9 | length 2
  Bottom Layer w0.6: C15.1 -53.37,-68.782 U5.9
NetC16_1: C16.1 U6.9 | length 2
  Bottom Layer w0.6: C16.1 -71.017,-68.782 U6.9
NetC17_1: C17.1 U7.9 | length 2
  Bottom Layer w0.6: C17.1 -88.54,-68.74 U7.9
NetJ3_1: J3.1 U3.11 | length 7.5
  Top Layer w0.457: U3.11 -15.9,-74.142 -15.9,-79.96 J3.1
NetJ3_2: J3.2 U3.12 | length 5.3
  Top Layer w0.457: U3.12 -15.29,-74.192 -15.29,-76.76 J3.2
NetJ3_3: J3.3 U3.13 | length 7.2
  Top Layer w0.305: -13.051,-76.52 cw(c-13.235,-76.704) -12.975,-76.704 -12.975,-80.345 J3.3
  Top Layer w0.457: -13.051,-76.52 -13.051,-73.733 U3.13
NetJ3_4: J3.4 U3.15 | length 5.4
  Top Layer w0.457: J3.4 -10.79,-77.4 -10.79,-75.919 -9.34,-74.47 U3.15
NetJ3_5: J3.5 U3.16 | length 8.1
  Top Layer w0.457: J3.5 -10.18,-76.202 U3.16
NetJ3_6: J3.6 U3.14 | length 14.4
  Top Layer w0.305: -12.4,-76.58 ccw(c-12.219,-76.761) -12.475,-76.761 -12.475,-78.83 -11.405,-79.9 -11.405,-79.955
  Top Layer w0.457: -12.4,-76.58 -12.4,-74.862 U3.14 ; -11.405,-79.955 -11.405,-80.621 ccw(c-10.18,-80.6) -8.955,-80.6 -8.955,-78.105 J3.6
NetJ3_7: J3.7 U3.17 | length 7.8
  Top Layer w0.457: J3.7 -7.64,-76.337 -5.78,-74.477 U3.17
NetJ3_8: J3.8 U3.18 | length 6
  Top Layer w0.457: J3.8 -7,-77.43 -7,-76.582 U3.18
NetJ4_1: J4.1 U4.11 | length 7.4
  Top Layer w0.457: U4.11 -33.46,-74.132 -33.46,-80.126 J4.1
NetJ4_2: J4.2 U4.12 | length 5.2
  Top Layer w0.457: U4.12 -32.85,-74.202 -32.85,-76.926 J4.2
NetJ4_3: J4.3 U4.13 | length 7.2
  Top Layer w0.305: -30.775,-76.58 cw(c-30.956,-76.761) -30.7,-76.761 -30.7,-80.346 J4.3@-30.521,-80.525
  Top Layer w0.457: -30.775,-76.58 -30.749,-76.554 -30.749,-73.881 U4.13
NetJ4_4: J4.4 U4.15 | length 5.6
  Top Layer w0.457: J4.4 -28.516,-77.4 -28.516,-76.24 -26.7,-74.424 -26.7,-73.772 U4.15
NetJ4_5: J4.5 U4.16 | length 8.2
  Top Layer w0.457: J4.5 -27.906,-76.493 -25.11,-73.696 U4.16
NetJ4_6: J4.6 U4.14 | length 14.5
  Top Layer w0.305: -30.125,-76.58 ccw(c-29.944,-76.761) -30.2,-76.761 -30.2,-78.955 -29.131,-80.024 -29.131,-80.105
  Top Layer w0.457: -30.125,-76.58 -30.125,-75.037 U4.14 ; -29.131,-80.105 -29.131,-80.621 ccw(c-27.906,-80.6) -26.681,-80.6 -26.681,-78.105 J4.6
NetJ4_7: J4.7 U4.17 | length 7.9
  Top Layer w0.457: J4.7 -25.366,-76.535 -23.33,-74.498 U4.17
NetJ4_8: J4.8 U4.18 | length 5.9
  Top Layer w0.457: J4.8 -24.572,-77.584 -24.572,-76.604 U4.18
NetJ5_1: J5.1 U5.11 | length 7.4
  Top Layer w0.457: U5.11 -51,-74.144 -51,-80.313 J5.1
NetJ5_2: J5.2 U5.12 | length 5.1
  Top Layer w0.457: U5.12 -50.39,-74.19 -50.39,-77.112 J5.2
NetJ5_3: J5.3 U5.13 | length 7.2
  Top Layer w0.305: -48.5,-76.58 cw(c-48.681,-76.761) -48.425,-76.761 -48.425,-80.348 J5.3@-48.246,-80.526
  Top Layer w0.457: -48.5,-76.58 -48.5,-74.997 -48.002,-74.5 U5.13
NetJ5_4: J5.4 U5.15 | length 5.5
  Top Layer w0.457: J5.4 -46.242,-77.4 -46.242,-76.172 -44.442,-74.372 U5.15
NetJ5_5: J5.5 U5.16 | length 8.3
  Top Layer w0.457: J5.5 -45.632,-76.424 -42.79,-73.582 U5.16
NetJ5_6: J5.6 U5.14 | length 14.6
  Top Layer w0.305: -47.85,-76.605 ccw(c-47.669,-76.786) -47.925,-76.786 -47.925,-78.955 -46.857,-80.022 -46.857,-80.055
  Top Layer w0.457: -47.85,-76.605 -47.85,-75.209 U5.14 ; -46.857,-80.055 -46.857,-80.621 ccw(c-45.632,-80.6) -44.407,-80.6 -44.407,-78.105 J5.6
NetJ5_7: J5.7 U5.17 | length 7.9
  Top Layer w0.457: J5.7 -43.092,-76.621 -40.882,-74.411 U5.17
NetJ5_8: J5.8 U5.18 | length 6
  Top Layer w0.457: J5.8 -42.327,-77.556 -42.327,-76.806 U5.18
NetJ6_1: J6.1 U6.11 | length 7.3
  Top Layer w0.457: U6.11 -68.625,-74.167 -68.625,-80.414 J6.1
NetJ6_2: J6.2 U6.12 | length 5.1
  Top Layer w0.457: U6.12 -68.015,-74.167 -68.015,-77.213 J6.2
NetJ6_3: J6.3 U6.13 | length 7.3
  Top Layer w0.305: -66.2,-76.58 cw(c-66.321,-76.7) -66.15,-76.7 -66.15,-80.349 J6.3@-65.948,-80.551
  Top Layer w0.457: -66.2,-76.58 -66.2,-75.05 -65.65,-74.5 U6.13
NetJ6_4: J6.4 U6.15 | length 5.5
  Top Layer w0.457: J6.4 -63.968,-77.4 -63.968,-76.378 -62.09,-74.5 U6.15
NetJ6_5: J6.5 U6.16 | length 8.3
  Top Layer w0.457: J6.5 -63.359,-76.631 U6.16
NetJ6_6: J6.6 U6.14 | length 14.6
  Top Layer w0.305: -65.575,-76.577 ccw(c-65.394,-76.758) -65.65,-76.758 -65.65,-78.955 -65.609,-78.955 -64.584,-79.98
  Top Layer w0.457: -65.575,-76.577 -65.575,-75.287 U6.14 ; -64.584,-79.98 -64.584,-80.621 ccw(c-63.359,-80.6) -62.134,-80.6 -62.134,-78.105 J6.6
NetJ6_7: J6.7 U6.17 | length 8
  Top Layer w0.457: J6.7 -60.8,-80.581 -60.8,-76.697 -58.53,-74.427 U6.17
NetJ6_8: J6.8 U6.18 | length 6
  Top Layer w0.457: J6.8 -59.946,-77.663 -59.946,-76.778 U6.18
NetJ7_1: J7.1 U7.11 | length 7.3
  Top Layer w0.457: U7.11 -86.165,-74.177 J7.1
NetJ7_2: J7.2 U7.12 | length 5
  Top Layer w0.457: U7.12 -85.555,-74.157 -85.555,-77.4 J7.2
NetJ7_3: J7.3 U7.13 | length 7.5
  Top Layer w0.305: -83.95,-76.58 cw(c-84.131,-76.761) -83.875,-76.761 -83.875,-80.35 J7.3
  Top Layer w0.457: -83.95,-76.58 -83.95,-75.295 -83.2,-74.545 U7.13
NetJ7_4: J7.4 U7.15 | length 5.6
  Top Layer w0.457: J7.4 -82.355,-77.137 -79.64,-74.422 U7.15
NetJ7_5: J7.5 U7.16 | length 8.4
  Top Layer w0.457: J7.5 -81.085,-76.807 U7.16
NetJ7_6: J7.6 U7.14 | length 14.7
  Top Layer w0.305: -83.29,-76.58 ccw(c-83.086,-76.784) -83.375,-76.784 -83.375,-78.98 -82.31,-80.045 -82.31,-80.149
  Top Layer w0.457: -83.29,-76.58 -83.29,-75.52 -81.42,-73.65 U7.14 ; -82.31,-80.149 -82.31,-80.621 ccw(c-81.085,-80.6) -79.86,-80.6 -79.86,-78.105 J7.6
NetJ7_7: J7.7 U7.17 | length 8
  Top Layer w0.457: J7.7 -78.545,-76.955 -76.08,-74.49 U7.17
NetJ7_8: J7.8 U7.18 | length 6.1
  Top Layer w0.457: J7.8 -77.75,-77.585 -77.75,-77.032 U7.18
NetR2_2: R2.2 U3.10 U4.10 U5.10 U6.10 U7.10 | length 83.8
  Top Layer w0.6: R2.2@-92.45,-77.2 -90.573,-77.2 -88.54,-75.167 U7.10@-88.54,-73.97
  Bottom Layer w0.6: U7.10 -88.54,-72.67 -87.8,-71.93 -70.8,-71.93 ; U6.10 -70.99,-72.12 -70.8,-71.93 ; U5.10 -53.342,-72.072 -53.2,-71.93 ; U4.10 -35.79,-72.02 -35.7,-71.93 ; U3.10 -18.24,-72.659 -18.969,-71.93 -35.7,-71.93 ; -70.8,-71.93 -53.2,-71.93 ; -53.2,-71.93 -35.7,-71.93
PCIE_CK0_N: P4.23 U1.118 | length 4.5
  Top Layer w0.381: P4.23 -29.65,-4.555 U1.118
PCIE_CK0_P: P4.24 U1.117 | length 7.5
  Top Layer w0.381: P4.24 -28.38,-3.285 U1.117
PCIE_CK1_N: P4.31 U1.110 | length 4.5
  Top Layer w0.381: P4.31 -19.49,-4.555 U1.110
PCIE_CK1_P: P4.30 U1.111 | length 7.5
  Top Layer w0.381: P4.30 -20.76,-3.285 U1.111
PCIE_CK2_N: P5.33 U1.102 | length 7.5
  Top Layer w0.381: U1.102 -5.27,-16.22 P5.33
PCIE_CK2_P: P5.34 U1.103 | length 4.5
  Top Layer w0.381: U1.103 P5.34
PCIE_RX0_N: P4.27 U1.114 | length 4.5
  Top Layer w0.381: P4.27 -24.57,-4.555 U1.114
PCIE_RX0_P: P4.28 U1.113 | length 7.5
  Top Layer w0.381: P4.28 -23.3,-3.285 U1.113
PCIE_RX1_N: P4.32 U1.109 | length 7.5
  Top Layer w0.381: P4.32 -18.22,-3.285 U1.109
PCIE_RX1_P: P4.33 U1.108 | length 4.5
  Top Layer w0.381: P4.33 -16.95,-4.555 U1.108
PCIE_RX2_N: P5.32 U1.101 | length 4.5
  Top Layer w0.381: U1.101 P5.32
PCIE_RX2_P: P5.31 U1.100 | length 7.5
  Top Layer w0.381: U1.100 -5.27,-18.76 P5.31
PCIE_TX0_N: P4.26 U1.115 | length 7.5
  Top Layer w0.381: P4.26 -25.84,-3.285 U1.115
PCIE_TX0_P: P4.25 U1.116 | length 4.5
  Top Layer w0.381: P4.25 -27.11,-4.555 U1.116
PCIE_TX1_N: P4.34 U1.107 | length 7.5
  Top Layer w0.305: P4.34 -15.68,-3.285 U1.107
PCIE_TX1_P: P4.35 U1.106 | length 4.5
  Top Layer w0.305: P4.35 -14.41,-4.555 U1.106
  Top Layer w0.381: U1.106@-14.425,-8.985 U1.106
PCIE_TX2_N: P5.29 U1.98 | length 7.5
  Top Layer w0.381: U1.98 -5.27,-21.3 P5.29
PCIE_TX2_P: P5.30 U1.99 | length 4.5
  Top Layer w0.381: U1.99 P5.30
PERST_N: P5.36 U1.105 | length 4.5
  Top Layer w0.381: U1.105 P5.36
RESET: P5.26 U1.95 | length 4.5
  Top Layer w0.381: U1.95 P5.26
RTS2_N: P3.6 U1.14 | length 8.1
  Top Layer w0.381: P3.6 U1.14@-61.005,-28.915 ; -63.005,-28.915 -63,-28.92
RTS3_N: P3.8 U1.16 | length 8.1
  Top Layer w0.381: P3.8 U1.16@-61.005,-31.455 ; -63.005,-31.455 -63,-31.46
RXD2: P3.3 U1.11 | length 11.1
  Top Layer w0.381: P3.3 -70.325,-25.11 U1.11
RXD3: P3.5 U1.13 | length 11.1
  Top Layer w0.381: P3.5 -70.325,-27.65 U1.13
TXD2: P3.2 U1.10 | length 8.1
  Top Layer w0.381: P3.2 U1.10@-61.005,-23.835 ; -63.005,-23.835 -63,-23.84
TXD3: P3.4 U1.12 | length 8.1
  Top Layer w0.381: P3.4 U1.12@-61.005,-26.375 ; -63.005,-26.375 -63,-26.38
USB2_N: J8.2 U1.18 | length 25.4
  Top Layer w0.305: J8.2 -81.143,-32.447 cw(c-82.939,-34.244) -80.399,-34.244 -80.399,-36.059 ccw(c-79.2,-36.059) -79.2,-37.257 -75.652,-37.257 ccw(c-75.652,-34.26) -73.533,-36.379 -71.625,-34.471 cw(c-69.506,-36.591) -69.506,-33.594 -62.359,-33.594 -61.952,-34 U1.18
USB2_P: J8.3 U1.17 | length 24.7
  Top Layer w0.305: J8.3 -79.197,-32.447 ccw(c-77.401,-34.244) -79.941,-34.244 -79.941,-36.059 ccw(c-79.2,-36.059) -79.2,-36.8 -75.652,-36.8 ccw(c-75.652,-34.26) -73.856,-36.056 -71.68,-33.88 cw(c-69.884,-35.676) -69.884,-33.136 -62.359,-33.136 -61.952,-32.73 U1.17
USB3_N: J9.2 U1.26 | length 43.3
  Top Layer w0.305: J9.2 -81.827,-44.597 cw(c-83.623,-42.801) -83.623,-45.341 -85.199,-45.341 ccw(c-85.199,-46.7) -86.557,-46.7 -86.557,-53.2 ccw(c-84.9,-53.2) -84.9,-54.857 -79.052,-54.857 ccw(c-79.052,-51.86) -76.933,-53.979 -67.451,-44.498 cw(c-65.655,-46.294) -65.655,-43.754 -62.359,-43.754 -61.952,-44.16 U1.26
USB3_P: J9.3 U1.25 | length 41.8
  Top Layer w0.305: J9.3 -81.827,-46.543 ccw(c-83.623,-48.339) -83.623,-45.799 -85.199,-45.799 ccw(c-85.199,-46.7) -86.1,-46.7 -86.1,-53.2 ccw(c-84.9,-53.2) -84.9,-54.4 -79.052,-54.4 ccw(c-79.052,-51.86) -77.256,-53.656 -67.774,-44.174 cw(c-65.655,-46.294) -65.655,-43.296 -62.359,-43.296 -61.952,-42.89 U1.25
USB3_SS_RX_N: J9.5 U1.23 | length 23.1
  Top Layer w0.305: J9.5 -80.256,-49.526 cw(c-78.5,-51.282) -78.5,-48.799 -78.048,-48.799 ccw(c-78.048,-46.152) -76.177,-48.023 -68.975,-40.821 cw(c-66.856,-42.941) -66.856,-39.944 -65.201,-39.944 -62.359,-39.944 -61.952,-40.35 U1.23
USB3_SS_RX_P: J9.6 U1.22 | length 23.1
  Top Layer w0.305: J9.6 -80.256,-47.614 ccw(c-78.5,-45.858) -78.5,-48.341 -78.048,-48.341 ccw(c-78.048,-46.152) -76.5,-47.7 -69.03,-40.23 cw(c-67.234,-42.026) -67.234,-39.486 -65.201,-39.486 -62.359,-39.486 -61.952,-39.08 U1.22
USB3_SS_TX_N: J9.8 U1.21 | length 21.7
  Top Layer w0.305: J9.8 -80.273,-43.543 cw(c-78.476,-45.339) -78.476,-42.799 -77.193,-42.799 ccw(c-77.193,-39.801) -75.074,-41.921 -71.301,-38.148 cw(c-69.505,-39.944) -69.505,-37.404 -62.359,-37.404 -61.952,-37.81 U1.21
USB3_SS_TX_P: J9.9 U1.20 | length 21.7
  Top Layer w0.305: J9.9 -80.273,-41.597 ccw(c-78.476,-39.801) -78.476,-42.341 -77.193,-42.341 ccw(c-77.193,-39.801) -75.397,-41.597 -71.624,-37.824 cw(c-69.505,-39.944) -69.505,-36.946 -62.359,-36.946 -61.952,-36.54 U1.20
WPS: P4.29 S1.1 U1.112 | length 58.5
  Top Layer w0.381: P4.29 -22.03,-4.555 U1.112
  Bottom Layer w0.381: S1.1 -65.5,-4.2 -58.4,-11.3 -23,-11.3 -22.045,-10.345 P4.29
pads on no net: J2.A5 J2.B5 J3. J4. J5. J6. J7. J8.5 J8.6 J8.7 J8.8 J9. P4.36 P5.1

## Polygon pours and split planes (outlines as drawn)
GND on Top Layer "Top Layer-GND" (solid, pour order 16): -95,0 0,0 0,-70 -95,-70
GND on Bottom Layer "Bottom Layer-GND" (solid, pour order 14): -95,0 -95,-70 0,-70 0,0

## Other copper
Top Layer:
  rectangle net 3V3: -70.025,-16.823 -65.025,-11.823
  rectangle net 5VD: -86.143,-12.623 -81.143,-7.623

## Silkscreen, mask and mechanical layers (free items; w line width, h text height)
Top Overlay:
  text "3V3" at -66.8,-7.44 h1 r90
  text "GND" at -64.4,-7.44 h1 r90
  text "5V" at -93.6,-11.4 h1
  text "GND" at -94.394,-14.014 h1
Bottom Overlay:
  lines w0.254: -87.55,-27.023 -76.45,-27.023 -76.45,-15.973 -87.55,-15.973 -87.55,-27.023
Mechanical 1:
  lines w0.254: 0,-0.048 0,-95 -95,-95 -95,0 0,0